# Altium PCB lm1117-5.PcbDoc
Units mm, origin at the board's own origin, x right, y up, seen from the top; angles counter-clockwise.
Board outline 152.4 x 101.6 mm, 2 copper layers (Top Layer, Bottom Layer); 24 components, 4 nets, 68 pads, 0 vias.
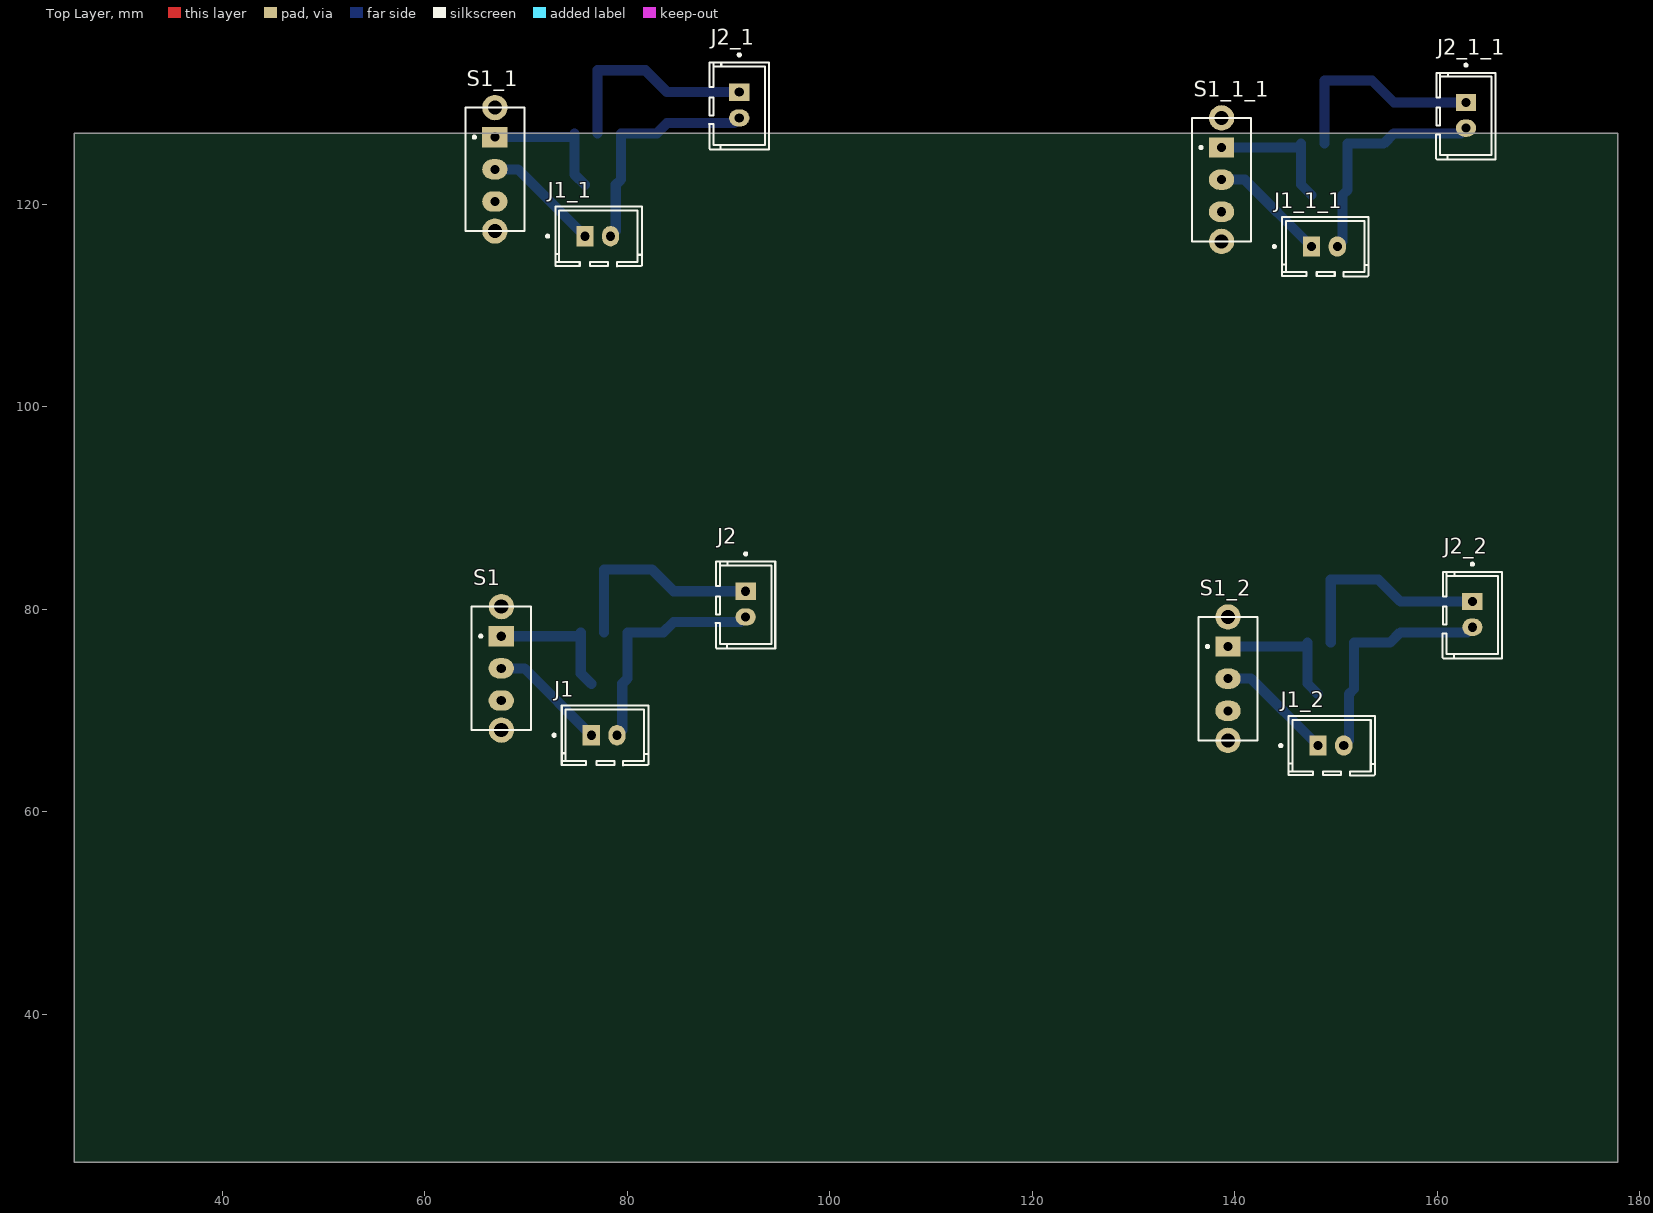
[diagram p0: Top Layer view]
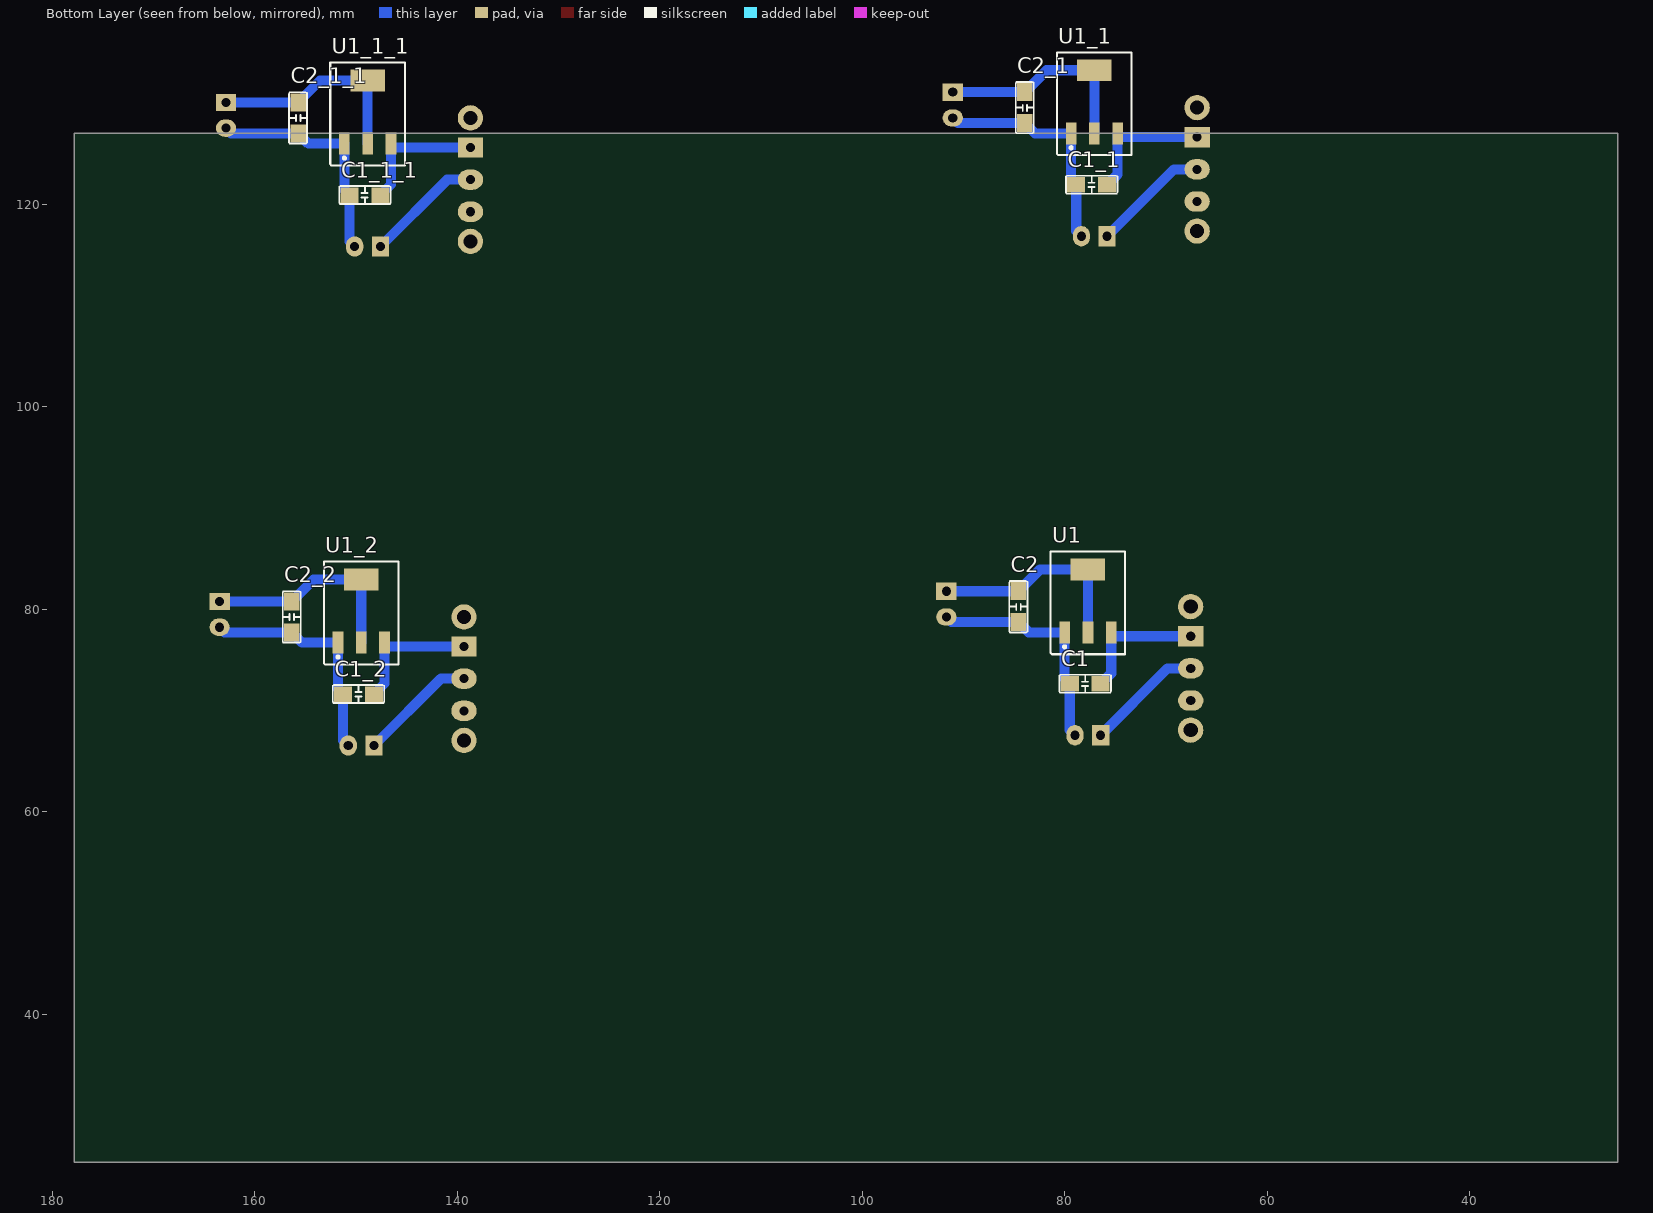
[diagram p1: Bottom Layer view, seen from below]

## Layer stack, top to bottom
Top Layer: signal copper 0.0356
Dielectric: dielectric 0.32, FR-4, Dk 4.8
Bottom Layer: signal copper 0.0356

## Board outline
25.4,25.4 177.8,25.4 177.8,127 25.4,127

## Design rules (kind name [scope] priority, off if disabled: settings)
Clearance [All] p1: gap=0.254
PolygonConnect [All] p1: connectstyle=Relief reliefconductorwidth=0.254 reliefentries=4 polygonreliefangle="90 Angle"
RoutingVias [All] p1: holewidth=0.711 width=1.27 viastyle="Through Hole" minholewidth=0.711 minwidth=1.27 maxholewidth=0.711 maxwidth=1.27
SilkToSilkClearance [All] p1 off: silktosilkclearance=0.254
SilkscreenOverComponentPads [All] p1 off: minsilkscreentomaskgap=0.254
SolderMaskExpansion [All] p1 off: expansion=0.102
TestPointUsage [All] p1: valid=0 allowmultiple=FALSE
Testpoint [All] p1: side=15 testpointundercomponent=TRUE minsize=1.016 maxsize=2.54 preferedsize=1.524 minholesize=0 maxholesize=1.016 preferedholesize=0.813 testpointgrid=0.025 style=1023 order=0123456789
Width [All] p1: maxlimit=1 minlimit=1 preferedwidth=1
22 further rules are at their usual default settings.

## Classes and differential pairs
component class lm1117-5: C1 C2 J1 J2 S1 U1

## Components (designator, comment, footprint, x,y, rotation, side; value= is the part's Value field where it differs from the comment)
C1 "CAP" CC1005-0402 79.502,72.644 r180 bottom
C1_1 "CAP" CC1005-0402 78.867,121.92 r180 bottom (schematic designator C1)
C1_1_1 "CAP" CC1005-0402 150.622,120.904 r180 bottom (schematic designator C1)
C1_2 "CAP" CC1005-0402 151.257,71.628 r180 bottom (schematic designator C1)
C2 "CAP" CC1005-0402 84.582,78.74 r90 bottom
C2_1 "CAP" CC1005-0402 83.947,128.016 r90 bottom (schematic designator C2)
C2_1_1 "CAP" CC1005-0402 155.702,127 r90 bottom (schematic designator C2)
C2_2 "CAP" CC1005-0402 156.337,77.724 r90 bottom (schematic designator C2)
J1 "HEAD2" HEAD2M 76.454,67.564 r90 top
J1_1 "HEAD2" HEAD2M 75.819,116.84 r90 top (schematic designator J1)
J1_1_1 "HEAD2" HEAD2M 147.574,115.824 r90 top (schematic designator J1)
J1_2 "HEAD2" HEAD2M 148.209,66.548 r90 top (schematic designator J1)
J2 "HEAD2" HEAD2M 91.694,81.788 r0 top
J2_1 "HEAD2" HEAD2M 91.059,131.064 r0 top (schematic designator J2)
J2_1_1 "HEAD2" HEAD2M 162.814,130.048 r0 top (schematic designator J2)
J2_2 "HEAD2" HEAD2M 163.449,80.772 r0 top (schematic designator J2)
S1 "SW-SPDT" SPDT-3Z 67.564,74.168 r0 top
S1_1 "SW-SPDT" SPDT-3Z 66.929,123.444 r0 top (schematic designator S1)
S1_1_1 "SW-SPDT" SPDT-3Z 138.684,122.428 r0 top (schematic designator S1)
S1_2 "SW-SPDT" SPDT-3Z 139.319,73.152 r0 top (schematic designator S1)
U1 "LM1117" DSO-G3/P2.3 80.01,77.724 r180 bottom
U1_1 "LM1117" DSO-G3/P2.3 79.375,127 r180 bottom (schematic designator U1)
U1_1_1 "LM1117" DSO-G3/P2.3 151.13,125.984 r180 bottom (schematic designator U1)
U1_2 "LM1117" DSO-G3/P2.3 151.765,76.708 r180 bottom (schematic designator U1)

## Footprints (in the part's own frame and the unit in brackets; to place one, negate y for a bottom-side part, rotate by r counter-clockwise, add the part's x,y. Pads: shape width x height; smd on the part's side, far side on the other; paste and mask are expansions set on the pad)
CC1005-0402 [mil]
  rect 70x60 smd: 1(0,0) 2(120,0)
  silkscreen extent -40,-35 160,35
DSO-G3/P2.3 [mil]
  rect 41.34x85 smd: 1(181.1,0) 2(0,0) 3(90.55,0)
  rect 133.86x85 smd: 3(90,245)
  silkscreen extent -55,-85 235,315
HEAD2M [mm]
  rect 2x1.7 hole 0.9: 1(0,0)
  oval 2x1.7 hole 0.9: 2(0,-2.54)
  silkscreen extent -2.97,-5.64 2.92,3.81
SPDT-3Z [mm]
  round 2.5 hole 1.4: 0(0,-6.096) 0(0,6.096)
  rect 2.5x2 hole 0.9: 1(0,3.175)
  oval 2.5x2 hole 0.9: 2(0,0) 3(0,-3.175)
  silkscreen extent -2.92,-6.1 2.92,6.1

## Part data
C1 C1_1 C1_1_1 C1_2 C2 C2_1 C2_1_1 C2_2: "Capacitor"
J1 J1_1 J1_1_1 J1_2 J2 J2_1 J2_1_1 J2_2: "Connector,2-pin"
S1 S1_1 S1_1_1 S1_2: "Single-Pole, Double-Throw Switch"

## Nets (pads, with @x,y where several pads share a name; then routed paths per layer and width w, separated by ;. In a path a pad name is that pad's centre, name@x,y a point inside that pad or via, vN(x,y) a via of type N, cw(c..) or ccw(c..) an arc to the next point about the centre after c; other vN are vias at no path point)
GND: C1.1 C2.1 J1.2 J2.2 U1.2 | length 22.9
  Bottom Layer w1: J1.2 79.502,68.072 C1.1 80.01,73.152 U1.2 83.566,77.724 C2.1 91.186,78.74 J2.2
VCC: C1.2 S1.1 U1.1 | length 13
  Bottom Layer w1: S1.1 U1.1@75.029,77.343 ; U1.1 75.41,73.688 C1.2
VIN: J1.1 S1.2 | length 11.6
  Bottom Layer w1: S1.2 69.85,74.168 J1.1
VOUT: C2.2 J2.1 U1.3 | length 21.1
  Bottom Layer w1: U1.3@77.71,77.724 U1.3@77.71,83.933 ; U1.3@77.724,83.947 82.423,83.947 C2.2 J2.1
pads on no net: C1_1.1 C1_1.2 C1_1_1.1 C1_1_1.2 C1_2.1 C1_2.2 C2_1.1 C2_1.2 C2_1_1.1 C2_1_1.2 C2_2.1 C2_2.2 J1_1.1 J1_1.2 J1_1_1.1 J1_1_1.2 J1_2.1 J1_2.2 J2_1.1 J2_1.2 J2_1_1.1 J2_1_1.2 J2_2.1 J2_2.2 S1.0 S1.3 S1_1.0 S1_1.1 S1_1.2 S1_1.3 S1_1_1.0 S1_1_1.1 S1_1_1.2 S1_1_1.3 S1_2.0 S1_2.1 S1_2.2 S1_2.3 U1_1.1 U1_1.2 U1_1.3 U1_1_1.1 U1_1_1.2 U1_1_1.3 U1_2.1 U1_2.2 U1_2.3
copper on no net: | length 205.7
  Bottom Layer w1: 66.929,123.444 69.215,123.444 75.819,116.84 ; 66.929,126.619 74.394,126.619 ; 74.775,127 74.775,122.964 75.819,121.92 ; 77.075,127 77.075,133.209 ; 77.089,133.223 81.788,133.223 83.947,131.064 91.059,131.064 ; 78.359,116.84 78.867,117.348 78.867,121.92 79.375,122.428 79.375,127 82.931,127 83.947,128.016 90.551,128.016 91.059,128.524 ; 138.684,122.428 140.97,122.428 147.574,115.824 ; 138.684,125.603 146.149,125.603 ; 139.319,73.152 141.605,73.152 148.209,66.548 ; 139.319,76.327 146.784,76.327 ; 146.53,125.984 146.53,121.948 147.574,120.904 ; 147.165,76.708 147.165,72.672 148.209,71.628 ; 148.83,125.984 148.83,132.193 ; 148.844,132.207 153.543,132.207 155.702,130.048 162.814,130.048 ; 149.465,76.708 149.465,82.917 ; 149.479,82.931 154.178,82.931 156.337,80.772 163.449,80.772 ; 150.114,115.824 150.622,116.332 150.622,120.904 151.13,121.412 151.13,125.984 154.686,125.984 155.702,127 162.306,127 162.814,127.508 ; 150.749,66.548 151.257,67.056 151.257,71.628 151.765,72.136 151.765,76.708 155.321,76.708 156.337,77.724 162.941,77.724 163.449,78.232